# Altium PCB A0033 - Carnaval kleding REV E - PCB.PcbDoc
Units mm, origin at the board's own origin, x right, y up, seen from the top; angles counter-clockwise.
Board outline 100 x 72 mm, 2 copper layers (Top Layer, Bottom Layer); 57 components, 45 nets, 212 pads, 110 vias.
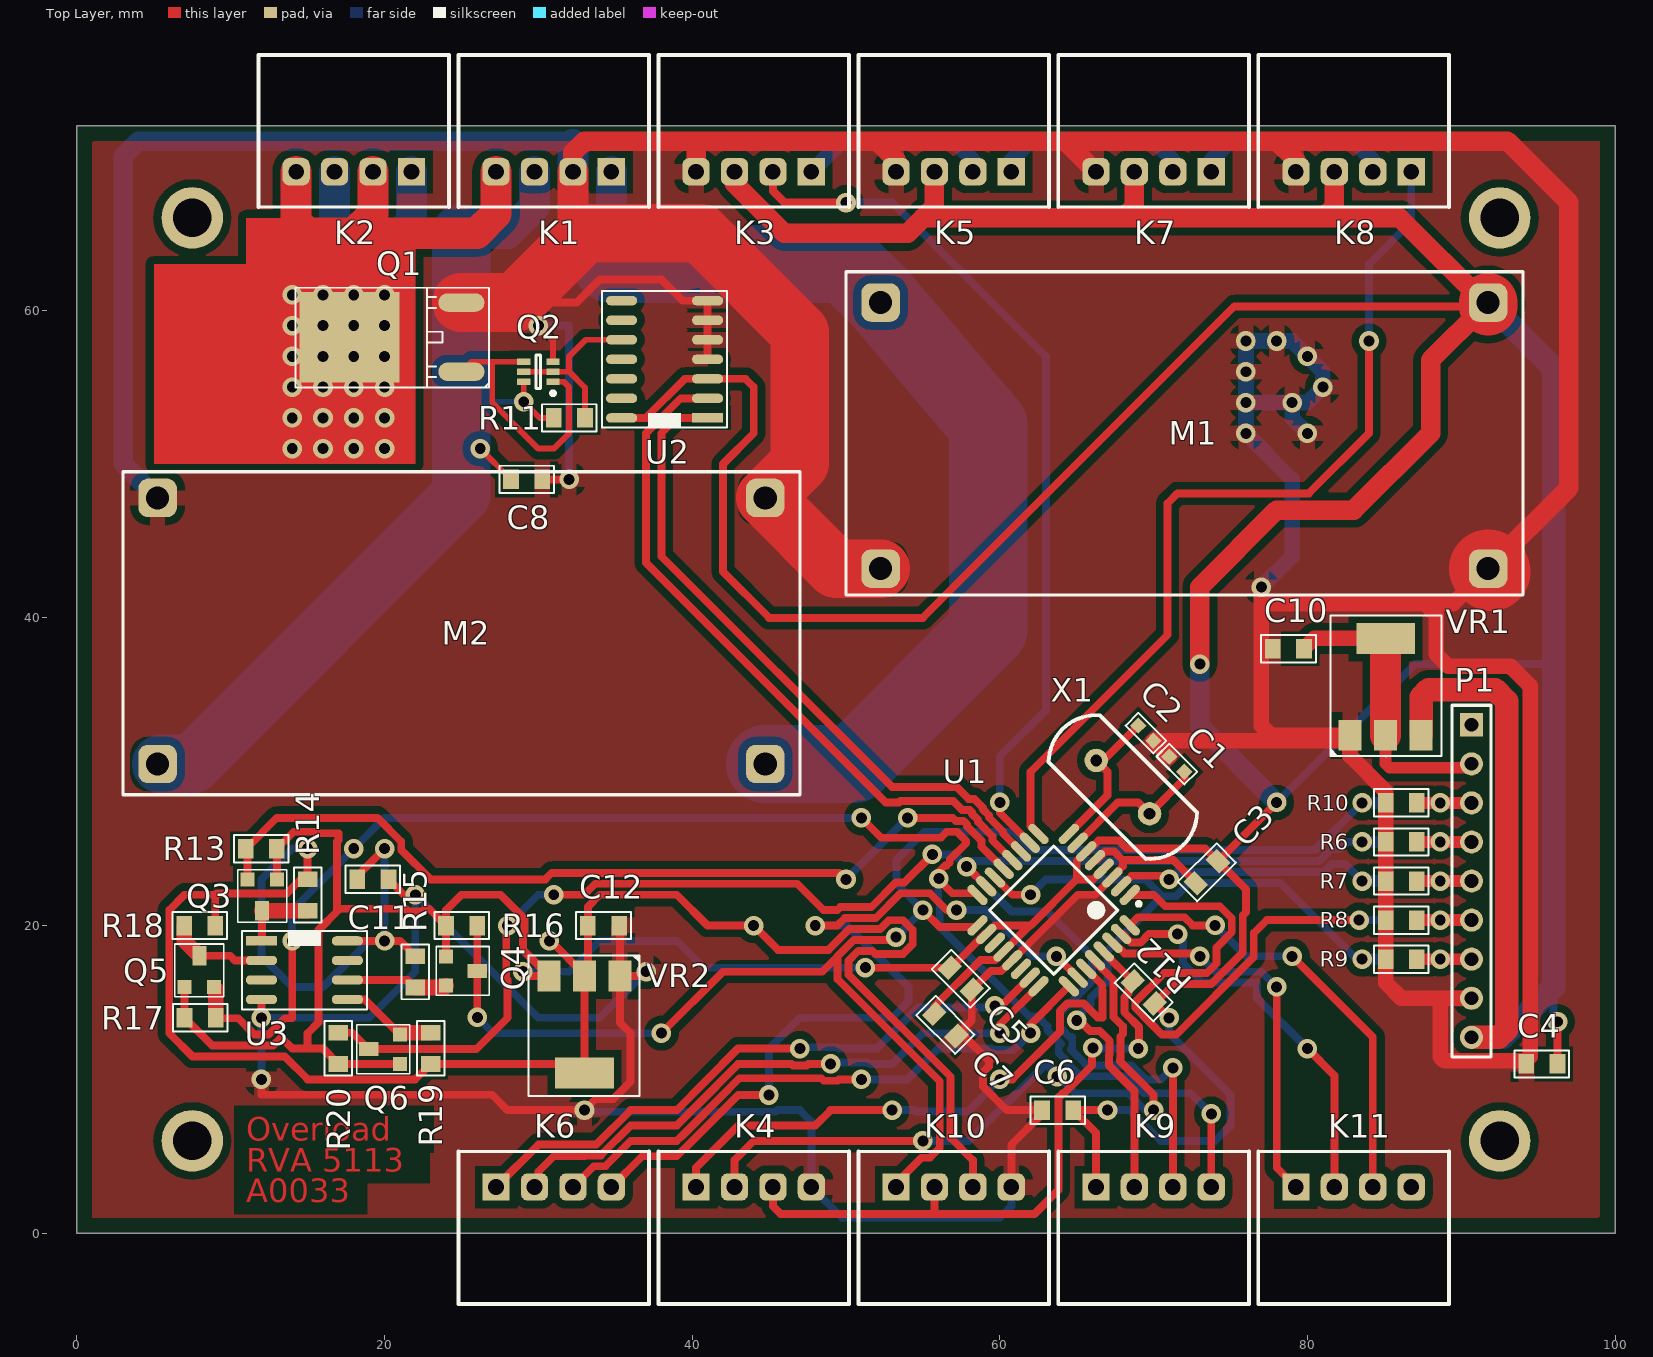
[diagram p0: Top Layer view]
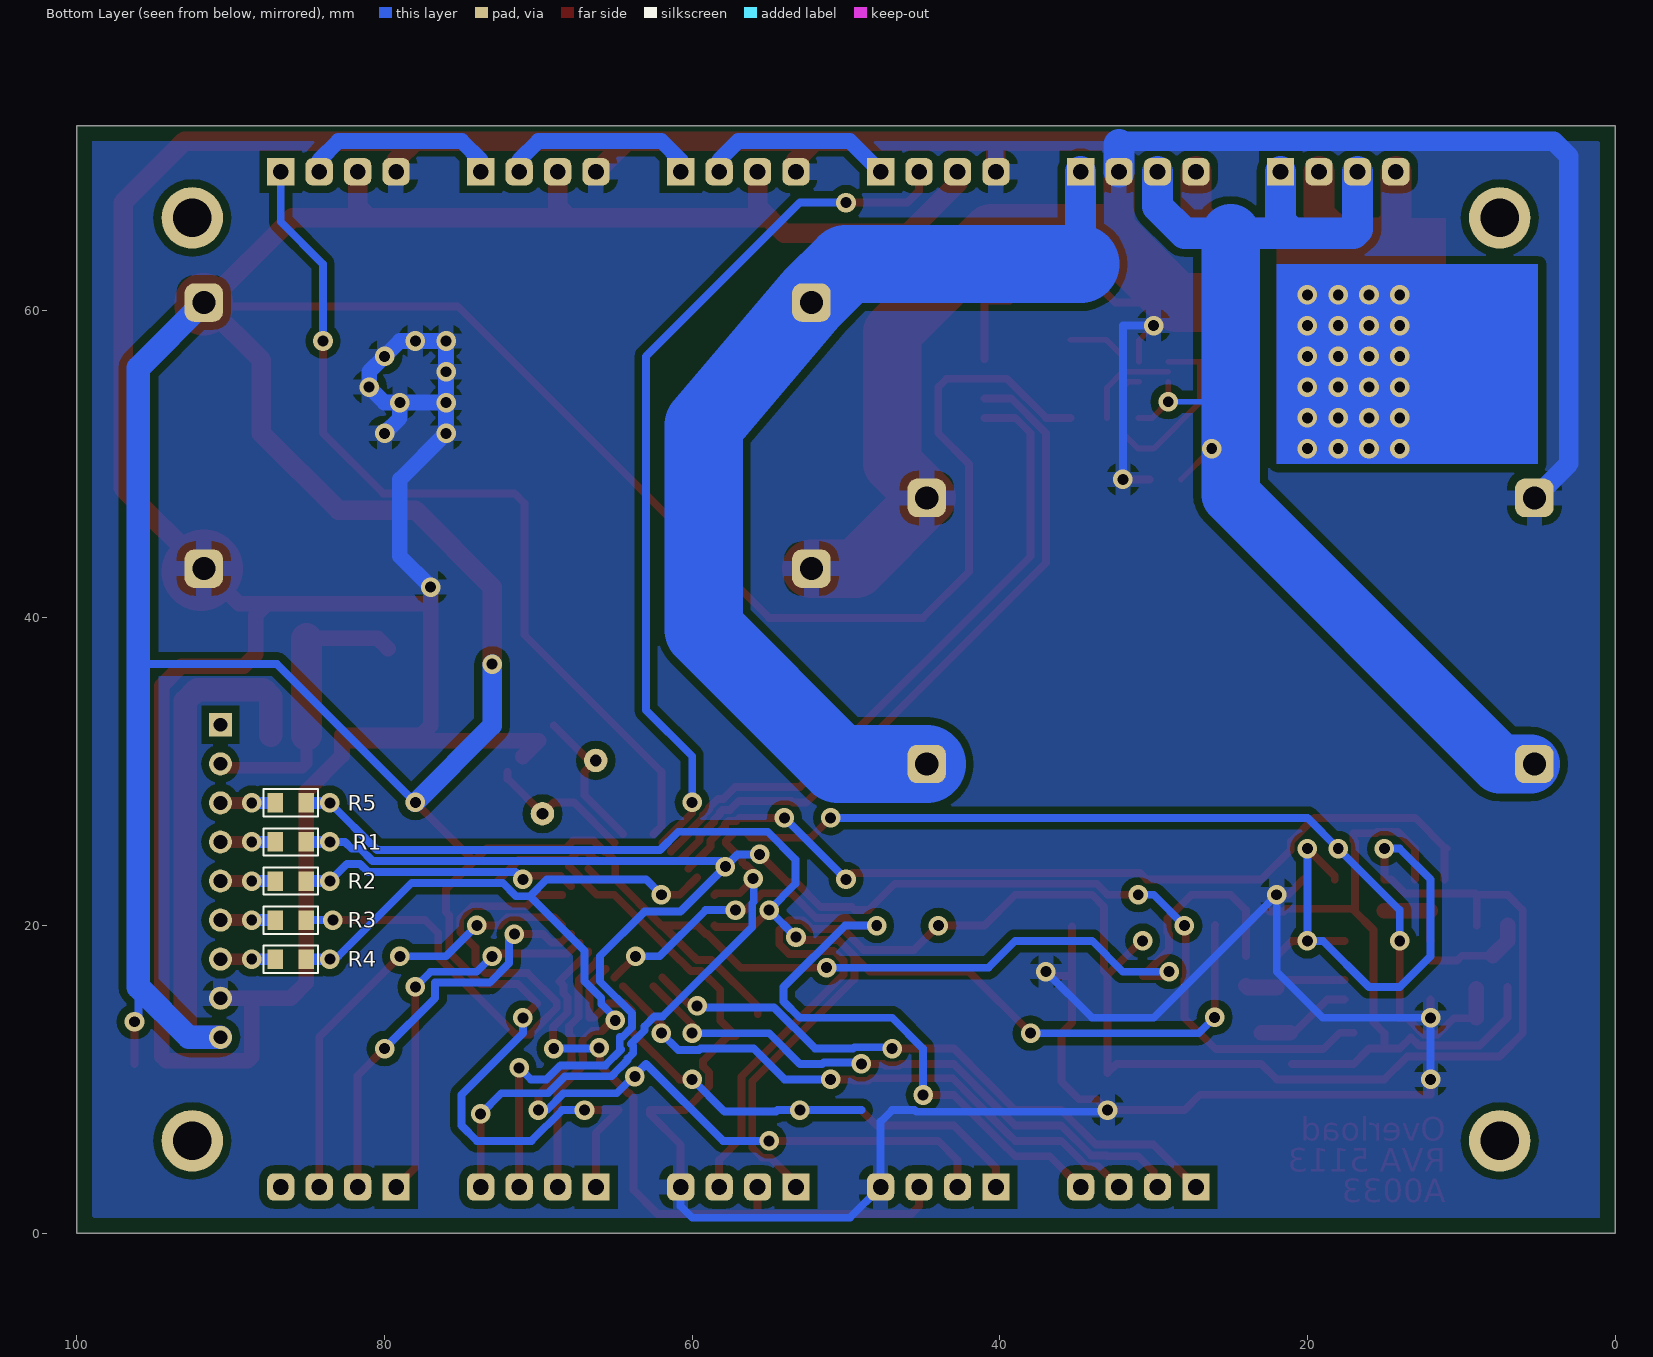
[diagram p1: Bottom Layer view, seen from below]

## Layer stack, top to bottom
Top Layer: signal copper 0.0356
Dielectric: dielectric 0.32, FR-4, Dk 4.8
Bottom Layer: signal copper 0.0356

## Board outline
0,0 0,72 100,72 100,0

## Design rules (kind name [scope] priority, off if disabled: settings)
Clearance Clearance_7 [InNamedPolygon('Top Layer-No Net')] p1: gap=0.508
Clearance Clearance_6 [InNamedPolygon('Top Layer-No Net')] p2: gap=0.508
Clearance Clearance_5 [InNamedPolygon('Top Layer-No Net')] p3: gap=0.508
Clearance Clearance_4 [InNamedPolygon('Top Layer-No Net') Or  InNamedPolygon('Top Layer-No Net') Or  InNamedPolygon('Top Layer-No Net')] p4: gap=0.762
Clearance Clearance_3 [InNamedPolygon('Top Layer-No Net') Or  InNamedPolygon('Top Layer-No Net')] p5: gap=0.508
Clearance Clearance_2 [InNamedPolygon('Top Layer-No Net') Or  InNamedPolygon('Top Layer-No Net')] p6: gap=0.254
Clearance Clearance_1 [InNamedPolygon('Top Layer-No Net') Or  InNamedPolygon('Top Layer-No Net')] p7: gap=0.508
Clearance [All] p8: gap=0.203
MinimumSolderMaskSliver [All] p1: minsoldermaskwidth=0.025
PlaneClearance [All] p1: clearance=1.016
PlaneConnect [All] p1: planeconnectstyle=Relief reliefexpansion=0.508 reliefentries=4 reliefconductorwidth=1.016 reliefairgap=0.508
PolygonConnect [All] p1: connectstyle=Relief reliefconductorwidth=1.016 reliefentries=4 polygonreliefangle="90 Angle" airgapwidth=0.508
RoutingVias [All] p1: holewidth=0.711 width=1.27 viastyle="Through Hole" minholewidth=0.711 minwidth=1.27 maxholewidth=0.711 maxwidth=1.27
SilkToSilkClearance [All] p1: silktosilkclearance=0
SilkToSolderMaskClearance [IsPad] p1: minsilkscreentomaskgap=0 clearancetoexposedcopper=TRUE
SolderMaskExpansion [All] p1: expansion=0.102
Width [All] p1: maxlimit=5.08 minlimit=0.254 preferedwidth=0.508
23 further rules are at their usual default settings.

## Components (designator, comment, footprint, x,y, rotation, side; value= is the part's Value field where it differs from the comment)
C1 "18pF" 0603C-GENERIC 72,30 r135 top
C2 "18pF" 0603C-GENERIC 69,33 r315 top
C3 "10uF" 0805C-GENERIC 74,24 r225 top
C4 "10uF" 0805C-GENERIC 96,11 r180 top
C5 "10uF" 0805C-GENERIC 58,16 r135 top
C6 "10uF" 0805C-GENERIC 63,8 r0 top
C7 "10uF" 0805C-GENERIC 57,13 r135 top
C8 "10uF" 0805C-GENERIC 30,49 r180 top
C10 "10uF" 0805C-GENERIC 78,38 r0 top
C11 "10uF" 0805C-GENERIC 20,23 r180 top
C12 "10uF" 0805C-GENERIC 35,20 r180 top
K1 "XH4 2.54 H" "XH4 2.54 H" 31,69 r180 top
K2 "XH4 2.54 H" "XH4 2.54 H" 18,69 r180 top
K3 "XH4 2.54 H" "XH4 2.54 H" 44,69 r180 top
K4 "XH4 2.54 H" "XH4 2.54 H" 44,3 r0 top
K5 "XH4 2.54 H" "XH4 2.54 H" 57,69 r180 top
K6 "XH4 2.54 H" "XH4 2.54 H" 31,3 r0 top
K7 "XH4 2.54 H" "XH4 2.54 H" 70,69 r180 top
K8 "XH4 2.54 H" "XH4 2.54 H" 83,69 r180 top
K9 "XH4 2.54 H" "XH4 2.54 H" 70,3 r0 top
K10 "XH4 2.54 H" "XH4 2.54 H" 57,3 r0 top
K11 "XH4 2.54 H" "XH4 2.54 H" 83,3 r0 top
M1 "DC/DC XL6009E1" "DCDC XL6009E1" 72,52 r270 top
M2 "DC/DC XL6009E1" "DCDC XL6009E1" 25,39 r90 top
P1 "Header 9" HDR1X9 90.666,33.052 r270 top
Q1 "IRLR2905" TO252AA-GDS 25,56 r180 top
Q2 "BC847BPN" SOT363_N 30,56 r180 top
Q3 "BSS138" SOT23-GDS 13,23 r270 top
Q4 "BSS138" SOT23-GDS 24,18 r0 top
Q5 "BSS138" SOT23-GDS 7,16 r90 top
Q6 "BSS138" SOT23-GDS 21,11 r180 top
R1 "680R" 0805R-680 85.332,25.432 r0 bottom
R2 "680R" 0805R-680 85.332,22.892 r0 bottom
R3 "680R" 0805R-680 85.332,20.352 r0 bottom
R4 "680R" 0805R-680 85.332,17.812 r0 bottom
R5 "680R" 0805R-680 85.332,27.972 r0 bottom
R6 "1K2" 0805R-1K2 86.856,25.432 r180 top
R7 "1K2" 0805R-1K2 86.856,22.892 r180 top
R8 "1K2" 0805R-1K2 86.856,20.352 r180 top
R9 "1K2" 0805R-1K2 86.856,17.812 r180 top
R10 "1K2" 0805R-1K2 86.856,27.972 r180 top
R11 "10K" 0805R-10K 31,53 r0 top
R12 "10K" 0805R-10K 70.072,14.93 r135 top
R13 "10K" 0805R-10K 13,25 r180 top
R14 "10K" 0805R-10K 15,23 r270 top
R15 "10K" 0805R-10K 22,18 r270 top
R16 "10K" 0805R-10K 24,20 r0 top
R17 "10K" 0805R-10K 7,14 r0 top
R18 "10K" 0805R-10K 9,20 r180 top
R19 "10K" 0805R-10K 23,11 r90 top
R20 "10K" 0805R-10K 17,11 r90 top
U1 "ATmega328P-AU" 32A_N 63.5,21 r225 top
U2 "SOP-14" SO14 41,53 r180 top
U3 "W25Q32" SO8 12,19 r0 top
VR1 "LD1117-SOT223" SOT223 85.078,35.084 r0 top
VR2 "LD1117-SOT223" SOT223 33,14 r180 top
X1 "16MC" "HC49_US TH" 68,29 r315 top

## Footprints (in the part's own frame and the unit in brackets; to place one, negate y for a bottom-side part, rotate by r counter-clockwise, add the part's x,y. Pads: shape width x height; smd on the part's side, far side on the other; paste and mask are expansions set on the pad)
32A_N [mm] "Thin QFP, 32-Leads, Body 7x7mm, Pitch 0.8mm, IPC Medium Density"
  oval 1.65x0.55 smd: 1(-4.2,2.8) 2(-4.2,2) 3(-4.2,1.2) 4(-4.2,0.4) 5(-4.2,-0.4) 6(-4.2,-1.2) 7(-4.2,-2) 8(-4.2,-2.8) 17(4.2,-2.8) 18(4.2,-2) 19(4.2,-1.2) 20(4.2,-0.4) 21(4.2,0.4) 22(4.2,1.2) 23(4.2,2) 24(4.2,2.8)
  oval 0.55x1.65 smd: 9(-2.8,-4.2) 10(-2,-4.2) 11(-1.2,-4.2) 12(-0.4,-4.2) 13(0.4,-4.2) 14(1.2,-4.2) 15(2,-4.2) 16(2.8,-4.2) 25(2.8,4.2) 26(2,4.2) 27(1.2,4.2) 28(0.4,4.2) 29(-0.4,4.2) 30(-1.2,4.2) 31(-2,4.2) 32(-2.8,4.2)
  silkscreen extent -4.32,-2.95 2.95,3.75, body extent -3.5,-3.5 3.5,3.5, height 1.2
0603C-GENERIC [mil] "CAPACITOR 0603"
  rect 30x30 smd: 1(0,0) 2(55,0)
  silkscreen extent -23,-23 78,23, body extent -4,-15 59,15, height 19
0805C-GENERIC [mil] "CAPACITOR 0805"
  rect 40x50 smd: 1(-10,0) 2(70,0)
  silkscreen extent -40,-35 100,35, body extent -11,-25 70,25, height 26
0805R-1K2 [mil] "RESISTOR 0805"
  rect 40x50 smd: 1(-10,0) 2(70,0)
  silkscreen extent -40,-35 100,35, body extent -11,-25 70,25, height 27
0805R-10K [mil] "RESISTOR 0805"
  rect 40x50 smd: 1(0,0) 2(80,0)
  silkscreen extent -30,-35 110,35, body extent -1,-25 80,25, height 27
0805R-680 [mil] "RESISTOR 0805"
  rect 40x50 smd: 1(-10,0) 2(70,0)
  silkscreen extent -40,-35 100,35, body extent -11,-25 70,25, height 27
"DCDC XL6009E1" [mm]
  rrect50% 2.5x2.5 hole 1.5: IN+(-8.5,-19.75) IN-(8.8,-19.75) OUT+(-8.5,19.75) OUT-(8.8,19.75)
  silkscreen extent -10.5,-22 10.5,22
"HC49_US TH" [mil]
  round 60 hole 30: 1(96.46,0) 2(-96.46,0)
  silkscreen extent -214,-89 214,89
HDR1X9 [mm] "Connector; Header; 9 Position"
  rect 1.5x1.5 hole 0.9: 1(0,0)
  round 1.5 hole 0.9: 2(2.54,0) 3(5.08,0) 4(7.62,0) 5(10.16,0) 6(12.7,0) 7(15.24,0) 8(17.78,0) 9(20.32,0)
  silkscreen extent -1.27,-1.27 21.59,1.27
SO8 [mil]
  rect 80x24 smd: 1(0,0)
  oval 80x24 smd: 2(0,-50) 3(0,-100) 4(0,-150) 5(220,-150) 6(220,-100) 7(220,-50) 8(220,0)
  silkscreen extent -50,-175 270,25, body extent -5,-172 222,22, height 57
SO14 [mil]
  rect 80x24 smd: 1(0,0)
  oval 80x24 smd: 2(0,-50) 3(0,-100) 4(0,-150) 5(0,-200) 6(0,-250) 7(0,-300) 8(220,-300) 9(220,-250) 10(220,-200) 11(220,-150) 12(220,-100) 13(220,-50) 14(220,0)
  silkscreen extent -50,-325 270,26, body extent -20,-325 240,25, height 61
SOT23-GDS [mil]
  rect 50x36 smd: D(80,-38)
  rect 36x36 smd: G(0,0) S(0,-75)
  silkscreen extent -25,-100 110,25, body extent -3,-95 94,20, height 41
SOT223 [mil]
  rect 59x79 smd: 1(-91,-107) 2(0,-107) 3(91,-107)
  rect 150x79 smd: 4(0,141)
  silkscreen extent -141,-161 143,200, body extent -131,-105 135,162, height 51
SOT363_N [mm] "SOT363, 6-Leads, Body 2x1.3mm, Pitch 0.65mm, Lead Span 2.1mm, IPC Medium Density"
  rect 0.85x0.4 smd: 1(-0.95,0.65) 2(-0.95,0) 3(-0.95,-0.65) 4(0.95,-0.65) 5(0.95,0) 6(0.95,0.65)
  silkscreen extent -1.07,-1.1 0.15,1.52, body extent -0.7,-1.1 0.7,1.1, height 1.1
TO252AA-GDS [mm]
  rect 6.5x5.9 smd: D(7.275,-2.25)
  oval 3x1.2 smd: G(0,0) S(0,-4.5)
  silkscreen extent -1.78,-5.46 10.79,1.02, body extent -0.32,-5.51 9.61,1.03, height 2.41
"XH4 2.54 H" [mil]
  rect 70x70 hole 40: 1(-147.64,0)
  rrect50% 70x70 hole 40: 2(-49.21,0) 3(49.21,0) 4(147.64,0)
  silkscreen extent -244,-299 244,91

## Part data
C1 C2: library part 0603C-15PF-50V-C0G-MUR, "CAPACITOR 0603 CERAMIC"
C3 C4 C5 C6 C7 C8 C10 C11 C12: library part 0805C-10UF-25V-X5R-SAM, "CAPACITOR 0805 CERAMIC"
K1 K2 K3 K4 K5 K6 K7 K8 K9 K10 K11: "4 PIN XH 2.54"
P1: "Header, 9-Pin"
Q1 Q3 Q4 Q5 Q6: "N CHANNEL MOSFET"
Q2: "NPN/PNP General-purpose Transistors"
R1 R2 R3 R4 R5: library part 0805R-680, "RESISTOR 0805 1/4 WATT THIN FILM"
R6 R7 R8 R9 R10: library part 0805R-1K2, "RESISTOR 0805 1/4 WATT THIN FILM"
R11 R12 R13 R14 R15 R16 R17 R18 R19 R20: library part 0805R-10K, "RESISTOR 0805 1/4 WATT THIN FILM"
U1: "8-bit AVR Microcontroller, 32KB Flash, 1KB EEPROM, 2KB SRAM, 32-pin TQFP, Industrial Grade (-40°C to 85°C)"
U2: library part WS2801
X1: library part "16MC-HC49US TH", "16MHZ CRSYTAL HC49US"

## Free pads (board coordinates)
  round 4 hole 2.5 mask+0.5: 0(7.5,6) 0(7.5,66) 0(92.5,6) 0(92.5,66)

## Via types
v1: diameter 1.27, hole 0.711, Top Layer to Bottom Layer, 110 vias

## Nets (pads, with @x,y where several pads share a name; then routed paths per layer and width w, separated by ;. In a path a pad name is that pad's centre, name@x,y a point inside that pad or via, vN(x,y) a via of type N, cw(c..) or ccw(c..) an arc to the next point about the centre after c; other vN are vias at no path point)
3V3_2: C11.2 C12.2 K10.3 R14.1 R15.1 R18.1 R19.1 U3.8 VR2.2 VR2.4 | length 145
  Top Layer w0.508: R18.1 9,22 ; v1(15,25) R14.1 14.561,23 13.647,22.086 9.086,22.086 9,22 ; U3.8 v1(20,19) 21,19 R15.1 ; C11.2 18.222,23.222 v1(20,25) ; v1(30.718,19) 30.806,19 VR2.2@33,16.806 ; K10.3 58.25,4.75 56.803,6.197 56.803,10.166 50.165,16.805 50.165,17.71 50.805,18.349 51.71,18.349 51.901,18.158 53.702,18.158 54.342,18.798 54.342,19.702 53.702,20.342 52.798,20.342 52.227,19.772 50.216,19.772 48.86,18.417 45.583,18.417 v1(44,20) 41,20 39,22 34,22 33.222,21.222 C12.2 33.222,17.028 VR2.2@33,16.806 ; 9,22 7,22 6,21 6,13 7.515,11.485 13.515,11.485 15,10 22,10 R19.1 32.419,11 VR2.4 VR2.2 VR2.2@33,16.806
  Bottom Layer w0.508: v1(15,25) 14,25 12,23 12,18 14,16 16,16 19,19 v1(20,19) v1(20,25)
5V: C3.1 C4.1 C5.2 C6.2 C7.2 K3.3 K5.3 K7.3 K8.3 K9.1 M1.OUT+ P1.9 Q3.G Q4.G Q5.G Q6.G R12.1 R13.1 R16.1 R17.1 R20.1 U1.4 U1.6 U1.18 U1.20 U2.3 U2.14 VR1.3 VR2.3 | length 473.9
  Top Layer w0.508: Q5.G R17.1 8.803,12.197 12.747,12.197 13.262,12.711 13.295,12.711 14.006,12 15,12 ; Q3.G R13.1 14.092,26.092 15.452,26.092 15.545,26 17,26 17,25.545 16.908,25.452 16.908,21.092 21.363,21.092 21.548,20.908 22.452,20.908 22.637,21.092 22.908,21.092 R16.1 ; 17,21 15.711,19.711 15.711,13.705 15,12.994 15,12 ; Q6.G R20.1 16,12 15,12 ; Q4.G R16.1 ; v1(29,17) 29.282,16.718 VR2.3 29,18.406 29,19.455 29.092,19.548 29.092,20.452 27.545,22 25,22 24,21 R16.1 ; U2.14 36.988,53 39.528,55.54 U2.3 43.46,55.54 44,55 44,52 42,50 42,43 45,40 55,40 75.25,60.25 91.5,60.25 M1.OUT+ ; v1(51.257,17.257) C5.2 56.833,17.257 59.02,19.444 U1.18 59.672,20 62,20 65,23 ; C7.2 55.743,14.749 58.752,17.758 59.692,17.758 U1.20 61.934,20 ; K9.1 66.25,6.528 C6.2 v1(67,8) ; U1.4 66.066,23 65,23 ; v1(71,14.002) R12.1 71.339,16.197 73.747,16.197 75.793,18.243 75.793,20.651 76,20.858 76,22.359 C3.1 ; v1(78,28) C3.1 ; C4.1 v1(96.254,13.746) ; 65,23 65,24.197 U1.6 65.717,24.818 66.418,25.519 67.739,25.519 68.259,25 73.359,25 C3.1
  Top Layer w1.27: K3.3 42.75,68.25 46,65 54,65 55.75,66.75 K5.3 ; 55,66 68,66 ; K7.3 68.75,66.75 68,66 ; v1(73,37) 73,42 78,47 83,47 88,52 88,56.75 M1.OUT+@91.5,60.25 ; K8.3 81.75,66.75 81,66 ; M1.OUT+ 91.5,60.5 86,66 81,66 ; 68,66 81,66
  Top Layer w1.524: VR1.3 87.389,34.855 87.872,35.338 92.19,35.338 92.952,34.576 92.952,13.24 92.444,12.732 P1.9
  Top Layer w3.81: M1.OUT+@91.75,60.25 M1.OUT+
  Bottom Layer w0.508: v1(29,17) 32,17 34,19 39,19 40.743,17.257 v1(51.257,17.257) ; v1(67,8) 68.455,8 70.455,6 74,6 75,7 75,9 71,13 v1(71,14.002) ; v1(78,28) 87,37 96,37 ; 96,16 96,14 v1(96.254,13.746)
  Bottom Layer w1.27: v1(73,37) 73,33 v1(78,28)
  Bottom Layer w1.524: P1.9 92.732,12.732 96,16 96,37 96,56.25 M1.OUT+
12V: C8.2 K1.3 K2.1 K2.3 M2.OUT+ Q2.6 R11.1 | length 78.7
  Top Layer w0.381: v1(26.222,51) C8.2 ; Q2.6 v1(29.05,54.05) 30.1,53 R11.1
  Bottom Layer w0.381: 25,54 25.05,54.05 v1(29.05,54.05)
  Bottom Layer w2.032: M2.OUT+ M2.OUT+@5.5,30.5 ; K2.3 16.75,65.25 17,65 21,65 ; K2.1 21.75,65.75 21,65 ; K1.3 29.75,66.75 28,65 25,65 21,65
  Bottom Layer w3.81: M2.OUT+@5.5,30.5 7.5,30.5 25,48 25,54 25,65
CKI: U1.11 U2.1 | length 43
  Top Layer w0.508: U2.1 39,53 38,52 38,44 53,29 57.197,29 57.971,28.226 58.336,28.226 58.908,27.654 58.908,27.548 59.289,27.167 59.289,27.034 60.226,26.097 60.226,25.971 U1.11
CS2_5V: Q3.S R13.2 U1.13 | length 57.6
  Top Layer w0.508: R13.2 11,25 13,27 19.545,27 21.092,25.452 21.092,24.908 23,23 30.455,23 30.878,23.422 49.578,23.422 v1(50,23) ; Q3.S R13.2@11.095,24.873 ; v1(54,27) 56.934,27 57.131,26.803 57.64,26.803 57.866,26.577 57.866,26.445 58.803,25.508 58.803,25.131 U1.13
  Bottom Layer w0.508: v1(50,23) v1(54,27)
CS_5V: K9.2 R4.1 U1.14 | length 52.6
  Top Layer w0.508: U1.14 60.803,22 v1(62,22) ; v1(65,13.837) 65,14 65.86,13.14 66.5,13.14 67.14,12.5 67.14,11.595 67.092,11.548 67.092,10.902 68.75,9.244 K9.2
  Bottom Layer w0.508: v1(62,22) 63,23 69.455,23 70.548,21.908 ; v1(65,13.837) 65,14 65.908,14.908 65.908,15.284 67,16.376 67,18.36 70.548,21.908 ; v1(83.554,17.812) 83.366,18 83,18 78.226,22.774 72.319,22.774 71.452,21.908 70.548,21.908
  Bottom Layer w0.762: v1(83.554,17.812) R4.1
"DATA IN_1": K8.1 U1.9 | length 58.5
  Top Layer w0.508: U1.9 62,26.46 62,30 70.908,38.908 70.908,47.452 71.548,48.092 80.092,48.092 84,52 v1(84,58)
  Bottom Layer w0.508: v1(84,58) 84,63 86.75,65.75 K8.1
"DATA UIT_1": K7.1 K8.2 | length 13
  Bottom Layer w1.016: K7.1 73.75,69.75 75,71 83,71 84.25,69.75 K8.2
"DATA UIT_2": K5.1 K7.2 | length 13
  Bottom Layer w1.016: K5.1 60.75,69.75 62,71 70,71 71.25,69.75 K7.2
"DATA UIT_3": K3.1 K5.2 | length 12.6
  Bottom Layer w1.016: K3.1 49.75,71 57,71 58.25,69.75 K5.2
"DATA UIT_4": K3.2 U1.10 | length 57.1
  Top Layer w0.508: K3.2 45.25,67.75 46,67 v1(50,67) ; v1(60,28) 60,27.328 U1.10
  Bottom Layer w0.508: v1(50,67) 53,67 63,57 63,34 60,31 v1(60,28)
FET_GATE: Q1.G Q2.1 Q2.4 | length 17.8
  Top Layer w0.381: Q1.G 25.65,56.65 27,56.65 ; Q2.4 27,56.65 ; Q2.1 31.65,55.35 32,55 32,52 31,51 30,51 27,54 27,56.65
GND: C1.2 C2.2 C3.2 C4.2 C5.1 C6.1 C7.1 C8.1 C10.1 C11.1 C12.1 K1.2 K3.4 K4.4 K5.4 K7.4 K8.4 K10.4 M1.IN- M1.OUT- M2.IN- M2.OUT- P1.8 Q1.S Q2.3 R6.2 R7.2 R8.2 R9.2 R10.2 U1.3 U1.5 U1.21 U2.4 U2.5 U2.6 U2.7 U3.4 VR1.1 VR2.1 | length 548.2
  Top Layer w0.381: 28.5,60.5 v1(30,59) 30.95,58.05 Q2.3
  Top Layer w0.508: v1(12,10) 12,9 26.996,9 27.996,8 v1@32.994,8 ; v1(12,14) U3.4 ; C11.1 21.254,22 v1(22,22) ; 28.5,60.5 32.5,60.5 34,62 38,62 39.38,60.62 U2.7 U2.6 U2.5 U2.4 ; C8.1 v1(32,49) ; v1(33,8) v1@32.994,8 ; C12.1@35.311,19.943 VR2.1 ; v1(37,17) 36.718,16.718 VR2.1 ; K10.4 60.75,5.75 62.746,7.746 C6.1 60.455,8 58.908,9.548 58.908,10.452 59.289,10.833 59.289,11.203 57.672,12.82 C7.1 58.18,13.82 C5.1 59.406,17.046 60.082,17.046 60.783,17.747 U1.21 65.066,22 66.197,22 U1.3 67.318,23.175 68,23.857 68,24.253 ; U1.5 66.283,24.253 66.838,24.808 67.445,24.808 68,24.253 ; C3.2 72.743,22.802 71.292,24.253 68,24.253 ; v1@32.994,8 33.705,8.711 34.847,8.711 36,9.864 36,13 35.311,13.689 VR2.1
  Top Layer w1.016: C1.2 C2.2 82.413,32.012 VR1.1 ; v1(77,42) 77,40.926 ; P1.8 88.634,15.272 ; M1.OUT- 89.476,40.926 87.618,40.926 ; 77,40.926 77,33 77.634,32.366 VR1.1 ; 77,40.926 87.618,40.926 ; VR1.1 82.767,31.045 85.078,28.734 R10.2 R6.2 R7.2 R8.2 R9.2 85.078,16.288 86.094,15.272 88.634,15.272 ; 87.618,40.926 88.38,40.164 88.38,37.624 89.142,36.862 93.206,36.862 94.476,35.592 94.476,11.476 94.208,11.208 88.888,11.208 88.634,11.462 88.634,15.272
  Top Layer w1.27: K1.2 32.25,70.25 33,71 40,71 ; K3.4 40.25,70.75 40,71 ; K5.4 53.25,69.75 52,71 ; K7.4 64.25,71 ; K8.4 79.25,69.75 78,71 ; M1.OUT- 97,48.45 97,67 93,71 78,71 ; 40,71 52,71 ; 52,71 64.25,71 ; 64.25,71 78,71
  Top Layer w2.032: K1.2 32.25,65.75 33,65
  Top Layer w3.81: Q1.S 28.5,60.5 33,65 40.55,65 47,58.55 47,50.05 M2.IN- 49.35,43.2 M1.IN-
  Top Layer w5.08: M1.OUT- M1.OUT-@91.95,43
  Bottom Layer w0.508: v1(12,10) v1(12,14) 19,14 22,17 v1(22,22) 30,14 34,14 v1(37,17) ; v1(30,59) 32,59 v1(32,49) ; v1(33,8) 33.11,7.89 45.435,7.89 45.545,8 47,8 47.75,7.25 K4.4 49.75,1 60,1 60.75,1.75 K10.4
  Bottom Layer w1.016: v1(77,42) 79,44 79,49 v1(76,52) v1(76,54) ; v1(80,52) 79,53 v1(79,54) ; v1(76,54) v1(76,56) v1(76,58) v1(78,58) 79,58 v1(80,57) 81,56 v1(81,55) 80,54 v1(79,54) ; v1(76,54) v1(79,54)
  Bottom Layer w1.27: M2.OUT- 3,50.05 3,70 4,71 32,71 32.25,70.75
  Bottom Layer w2.032: K1.2 32.25,70.75
LCD_CS_3V3: P1.7 R4.2 R9.1 | length 5.1
  Top Layer w0.762: R9.1 v1(88.634,17.812) P1.7
  Bottom Layer w0.762: R4.2 v1(88.634,17.812)
LCD_DC_3V3: P1.5 R2.2 R7.1 | length 5.1
  Top Layer w0.762: R7.1 v1(88.634,22.892) P1.5
  Bottom Layer w0.762: R2.2 v1(88.634,22.892)
LCD_DC_5V: R2.1 U1.2 | length 18.4
  Top Layer w0.508: U1.2 68.566,23.238 70.762,23.238 v1(71,23)
  Bottom Layer w0.508: v1(71,23) 71.485,23.485 81.079,23.485 81.594,24 82.446,24 v1(83.554,22.892)
  Bottom Layer w0.762: v1(83.554,22.892) R2.1
LCD_LED: C10.2 P1.2 VR1.2 VR1.4 | length 19.5
  Top Layer w0.762: VR1.2 85.078,30.512 85.332,30.258 90.412,30.258 P1.2
  Top Layer w1.016: C10.2 80.443,38.665 VR1.4
  Top Layer w2.032: VR1.2 VR1.4
LCD_MOSI_3V3: P1.4 R1.2 R6.1 | length 5.1
  Top Layer w0.762: R6.1 v1(88.634,25.432) P1.4
  Bottom Layer w0.762: R1.2 v1(88.634,25.432)
LCD_RESET_3V3: P1.6 R3.2 R8.1 | length 5.1
  Top Layer w0.762: R8.1 v1(88.634,20.352) P1.6
  Bottom Layer w0.762: R3.2 v1(88.634,20.352)
LCD_RESET_5V: R3.1 U1.1 | length 38.3
  Top Layer w0.508: U1.1 70.01,21.99 70.752,21.248 74.297,21.248 75.082,20.462 75.082,19.558 74.092,18.568 74.092,17.548 73.452,16.908 70.685,16.908 68.807,15.03 68.807,14.651 69.793,13.665 70.548,12.91 71.466,12.91 76.505,17.948 76.505,19.505 77.352,20.352 v1(83.352,20.352)
  Bottom Layer w0.508: v1(83.352,20.352) R3.1
LCD_SCK_3V3: P1.3 R5.2 R10.1 | length 5.1
  Top Layer w0.762: R10.1 v1(88.634,27.972) P1.3
  Bottom Layer w0.762: R5.2 v1(88.634,27.972)
MISO_5V: K9.4 Q5.S R17.2 U1.16 | length 99.8
  Top Layer w0.508: R17.2 9.032,13.968 10.487,13.968 11.548,12.908 12.452,12.908 13.513,13.968 14,13.968 v1(14,19) ; v1(51,27) 52.289,25.711 55.167,25.711 56.071,25.711 56.167,25.711 56.548,26.092 57.213,26.092 57.807,25.498 57.807,25.352 56.744,24.288 56.744,24.104 56.548,23.908 56.452,23.908 56,23.455 v1@56,23 ; v1(56.035,23.054) 56.035,23.035 v1@56,23 ; U1.16 58.448,22.092 56.908,22.092 v1@56,23 ; K9.4 v1(73.75,7.75)
  Top Layer w1.016: R17.2 Q5.S@9.032,15.873
  Bottom Layer w0.508: v1(14,19) 14,21 v1(18,25) 20,27 v1(51,27) ; v1(56.035,23.054) 56.035,23.035 56,23 56,21.545 56.092,21.452 56.092,20.548 56.092,19.908 61.908,14.092 62.452,14.092 63.092,13.452 63.092,13.194 63.98,12.307 63.836,12.164 63.836,11.708 64.197,11.348 64.197,11.253 64.357,11.092 65.092,10.357 65.253,10.197 68.27,10.197 69.375,9.092 72.408,9.092 v1(73.75,7.75)
MOSI_5V: K9.3 Q6.D R1.1 R20.2 U1.15 | length 115.1
  Top Layer w0.508: R20.2 17.901,13.032 Q6.D 25.965,11.965 ; 26,12 25.965,11.965 ; v1(28,20) 27.908,19.908 27.908,16.548 28,16.455 28,14 25.965,11.965 ; v1(31,22) 32.994,22 33.705,22.711 46.833,22.711 48.545,21 49.432,21 49.626,21.194 51.638,21.194 53.247,22.803 53.803,22.803 v1(55.619,24.619) ; v1(57.836,23.836) U1.15 ; K9.3 v1(71.25,10.75)
  Bottom Layer w0.508: v1(28,20) 30,22 v1(31,22) ; v1(71.25,10.75) 70.5,10 69.473,10 68.565,10.908 65.643,10.908 64.615,11.936 64.711,12.033 64.711,12.745 64.548,12.745 63.908,13.385 63.908,14.289 66,16.382 66,18 63.092,20.908 60.764,20.908 v1(57.836,23.836) ; v1(83.554,25.432) 82.568,25.432 82.136,25 81.588,25 80.784,24.197 58.197,24.197 v1(57.836,23.836) ; v1(55.619,24.619) 55.621,24.621 55.637,24.621 55.637,24.619 v1(55.619,24.619) ; v1(55.619,24.619) 57.053,24.619 v1(57.836,23.836)
  Bottom Layer w0.762: v1(83.554,25.432) R1.1
NetC1_1: C1.1 U1.7 X1.1 | length 9.7
  Top Layer w0.508: U1.7 67.672,28 69,28 X1.1 72,29.535 C1.1
NetC2_1: C2.1 U1.8 X1.2 | length 9.8
  Top Layer w0.508: U1.8 67,28.46 67,30 X1.2 66.732,30.732 C2.1
NetQ3_D: Q3.D R14.2 U3.1 | length 4.9
  Top Layer w0.508: U3.1 12.035,19.035 Q3.D
  Top Layer w1.016: Q3.D R14.2
NetQ4_S: Q4.S R15.2 U3.6 | length 6.7
  Top Layer w0.508: U3.6 21.508,16.46 R15.2
  Top Layer w1.016: R15.2 23.873,15.968 Q4.S
NetQ5_D: Q5.D R18.2 U3.2 | length 6.5
  Top Layer w0.508: Q5.D 9.968,18.032 10.27,17.73 U3.2
  Top Layer w1.016: R18.2 6.968,19.029 Q5.D
NetQ6_S: Q6.S R19.2 U3.5 | length 6.2
  Top Layer w0.508: U3.5 18.715,15.19 Q6.S
  Top Layer w1.016: Q6.S@21.127,13.032 R19.2
PB_PLUS1: K6.1 U1.23 | length 40.7
  Top Layer w0.508: K6.1 30.019,5.769 33.769,5.769 36,8 39,8 40.866,9.866 40.866,9.884 42.983,12 v1(47,12) ; v1(59.685,14.77) 59.901,14.77 60,14.672 U1.23
  Bottom Layer w0.508: v1@47.092,12 47.184,12.092 49.452,12.092 49.545,12 52.006,12 54.677,14.672 v1@60,14.672
PB_PLUS2: K6.2 U1.24 | length 39.1
  Top Layer w0.508: K6.2 30,3.25 30,4 31,5 33,5 33.057,5.057 34.063,5.057 36.006,7 39.006,7 41.578,9.572 41.578,9.589 42.988,11 46.455,11 46.548,10.908 47.452,10.908 47.545,11 v1(49,11) ; v1(60,13) 60,13.54 U1.24
  Bottom Layer w0.508: v1(49,11) 49.092,11.092 51.452,11.092 51.545,11 53,11 55,13 v1(60,13)
PB_PLUS3: K6.3 U1.25 | length 38.2
  Top Layer w0.508: K6.3 33.596,4.346 34.358,4.346 36.012,6 39,6 39.289,6.289 39.3,6.289 42.289,9.277 42.289,9.295 43.069,10.075 48.381,10.075 48.548,9.908 49.452,9.908 49.545,10 v1(51,10) ; v1(62,13) 62,13.56 U1.25
  Bottom Layer w0.508: v1(51,10) 54,10 56,12 59.455,12 59.548,11.908 60.908,11.908 v1(62,13)
PB_PLUS4: K6.4 U1.26 | length 54.9
  Top Layer w0.508: K6.4 36.75,5 39,5 39.289,5.289 39.295,5.289 39.583,5.578 39.595,5.578 43,8.983 v1(44.983,8.983) ; v1(48,20) 49.438,20 49.921,20.483 51.933,20.483 53.542,22.092 55.452,22.092 56.545,21 v1(57.184,21) ; v1(63.672,18) U1.26
  Bottom Layer w0.508: v1(44.983,8.983) 45,9 45,12 47,14 53,14 54.059,15.059 54.059,16 50.059,20 v1(48,20) ; v1(57.184,21) 59.127,21 62.127,18 v1(63.672,18)
PB_PLUS5: K11.1 U1.30 | length 25.4
  Top Layer w0.508: U1.30 67.414,18.879 68.115,18.178 72.822,18.178 v1(73,18) ; v1(78,16.006) 78,4.25 K11.1
  Bottom Layer w0.508: v1(73,18) 74,17 77.006,17 v1(78,16.006)
PB_PLUS6: K11.2 U1.31 | length 26.9
  Top Layer w0.508: U1.31 67.98,19.444 68.535,18.889 69.142,18.889 69.697,19.444 v1(71.556,19.444) ; v1(80,12) 81.75,10.25 K11.2
  Bottom Layer w0.508: v1(71.556,19.444) 71.908,19.092 71.908,17.548 73.167,16.289 76.711,16.289 76.711,15.289 v1(80,12)
PB_PLUS7: K11.3 U1.32 | length 29
  Top Layer w0.508: U1.32 68.976,20.537 72.008,20.537 72.535,20.01 v1(73.99,20.01) ; v1(79,18) 84.25,12.75 K11.3
  Bottom Layer w0.508: v1(73.99,20.01) 76,18 v1(79,18)
PB_PLUS8: K11.4
RESET_5V: K4.3 K10.2 R12.2 U1.29 | length 43.4
  Top Layer w0.508: K4.3 45.25,1.75 45.75,1.25 55.75,1.25 ; K10.2 55.75,1.25 ; v1(66.048,12.047) 66,12 66,10.919 64.173,9.092 64.081,9.092 63.813,8.824 63.813,2.813 62.25,1.25 55.75,1.25 ; U1.29 66.753,18.249 R12.2 68.366,16.097 68.366,15.595 68.095,15.324 68.095,14.356 69.047,13.405 69.047,12.047 v1(69,12)
  Bottom Layer w0.508: v1(66.048,12.047) 66,12 68,12 v1(69,12)
SCK_5V: K10.1 Q4.D R5.1 R16.2 U1.17 | length 101.8
  Top Layer w0.508: R16.2@26,20.032 R16.2 Q4.D v1(26.032,14.032) ; v1(38,13) 42,17 48.45,17 50.51,19.061 ; K10.1 53.25,3.25 54.908,4.908 55.452,4.908 56.092,5.548 56.092,9.872 49.454,16.51 49.454,18.004 50.51,19.061 ; v1(53.25,19.25) 53.061,19.061 50.51,19.061 ; v1(55,21) 56.092,19.908 58.448,19.908 U1.17
  Bottom Layer w0.508: v1(26.032,14.032) 27.064,13 v1(38,13) ; v1(53.25,19.25) v1(55,21) 53.289,22.711 53.289,24.289 55.092,26.092 60.908,26.092 62.092,24.908 80.49,24.908 v1(83.554,27.972)
  Bottom Layer w0.762: v1(83.554,27.972) R5.1
SCL_5V: K4.2 U1.28 | length 45.4
  Top Layer w0.508: K4.2 42.75,4.75 44,6 v1(55,6) ; U1.28 66.187,17.651 67.37,16.469 67.37,16.088 67.384,16.073 67.384,14.062 68,13.446 68,12.944 67.851,12.794 67.851,11.301 67.803,11.253 67.803,11.197 70,9 v1(70,8)
  Bottom Layer w0.508: v1(55,6) 58,6 63,11 ; v1(63.721,10.184) 63.721,10.279 63,11 ; v1(70,8) 69.461,8 68.369,9.092 64.908,9.092 63,11
SDA_5V: K4.1 U1.27 | length 45
  Top Layer w0.508: K4.1 40.25,4.25 43,7 48,7 49,8 v1(53,8) ; v1(60,10) 60.816,10 63.908,13.092 63.908,14.452 64.385,14.929 64.576,14.929 65.182,14.929 65.452,14.929 66.382,14 66.673,14 66.673,15.779 66.659,15.793 66.659,16.144 U1.27
  Bottom Layer w0.508: v1(53,8) 49,8 54.455,8 54.548,7.908 57.908,7.908 v1(60,10)
SDI: U1.12 U2.2 | length 45.5
  Top Layer w0.508: U2.2 39.264,54.27 37,52.006 37,43.586 52.586,28 53.455,28 53.548,28.092 56.973,28.092 57.551,27.515 58.042,27.515 58.197,27.36 58.197,27.253 58.578,26.872 58.578,26.739 59.515,25.802 59.515,25.551 U1.12
TOTEM: Q2.2 Q2.5 R11.2 U2.10 | length 11.2
  Top Layer w0.381: Q2.5 Q2.2 32,56 ; R11.2 33.032,54.968 32,56 ; U2.10 33.08,58.08 32,57 32,56
VCC: K1.1 M1.IN+ M2.IN+ | length 66.6
  Bottom Layer w2.032: 34.75,63 K1.1
  Bottom Layer w5.08: 34.75,63 50,63 52.25,60.75 59.25,52.5 59.25,39.25 50.5,30.5 M2.IN+
VLED: K1.4 K2.2 K2.4 Q1.D | length 24.3
  Top Layer w2.032: K2.4 14.25,65.75 15,65 18,65 ; K2.2 19.25,66.25 18,65 ; K1.4 27.25,66.25 26,65 18,65
  other v1: 14,51 16,51 18,51 20,51 14,53 16,53 18,53 20,53 14,55 16,55 18,55 20,55 14,57 16,57 18,57 20,57 14,59 16,59 18,59 20,59 14,61 16,61 18,61 20,61
pads on no net: P1.1 U1.19 U1.22 U2.8 U2.9 U2.11 U2.12 U2.13 U3.3 U3.7

## Polygon pours and split planes (outlines as drawn)
GND on Bottom Layer "Top Layer-No Net" (solid, remove dead copper, pour order 4): 0,72 100,72 100,0 0,0
GND on Top Layer "Top Layer-No Net" (solid, remove dead copper, pour order 6): 0,72 100,72 100,0 0,0

## Other copper
Top Layer:
  rectangle net VLED: 11,50 22,66
  rectangle net VLED: 5,50 11,63
  pour cut-out: 0,72 0,0 100,0 100,72 1,72 1,71 99,71 99,1 1,1 1,72
  text "Overload" at 11,6 h1.52
  text "RVA 5113" at 11,4 h1.52
  text "A0033" at 11,2 h1.52
Bottom Layer:
  rectangle net VLED: 5,50 22,63
  pour cut-out: 0,72 0,0 100,0 100,72 1,72 1,71 99,71 99,1 1,1 1,72

## Silkscreen, mask and mechanical layers (free items; w line width, h text height)
Mechanical 1:
  lines w0.254: 0,0 100,0 100,72 0,72 0,0 ; 1,1 1,71 99,71 99,1 1,1

## Dimensions
0,72 to 100,72 on Mechanical 1
100,72 to 100,0 on Mechanical 1